# Altium PCB Groundstation.PcbDoc
Units mm, origin at the board's own origin, x right, y up, seen from the top; angles counter-clockwise.
Board outline 53.34 x 50.8 mm, 2 copper layers (Top Layer, Bottom Layer); 8 components, 30 nets, 57 pads, 104 vias.
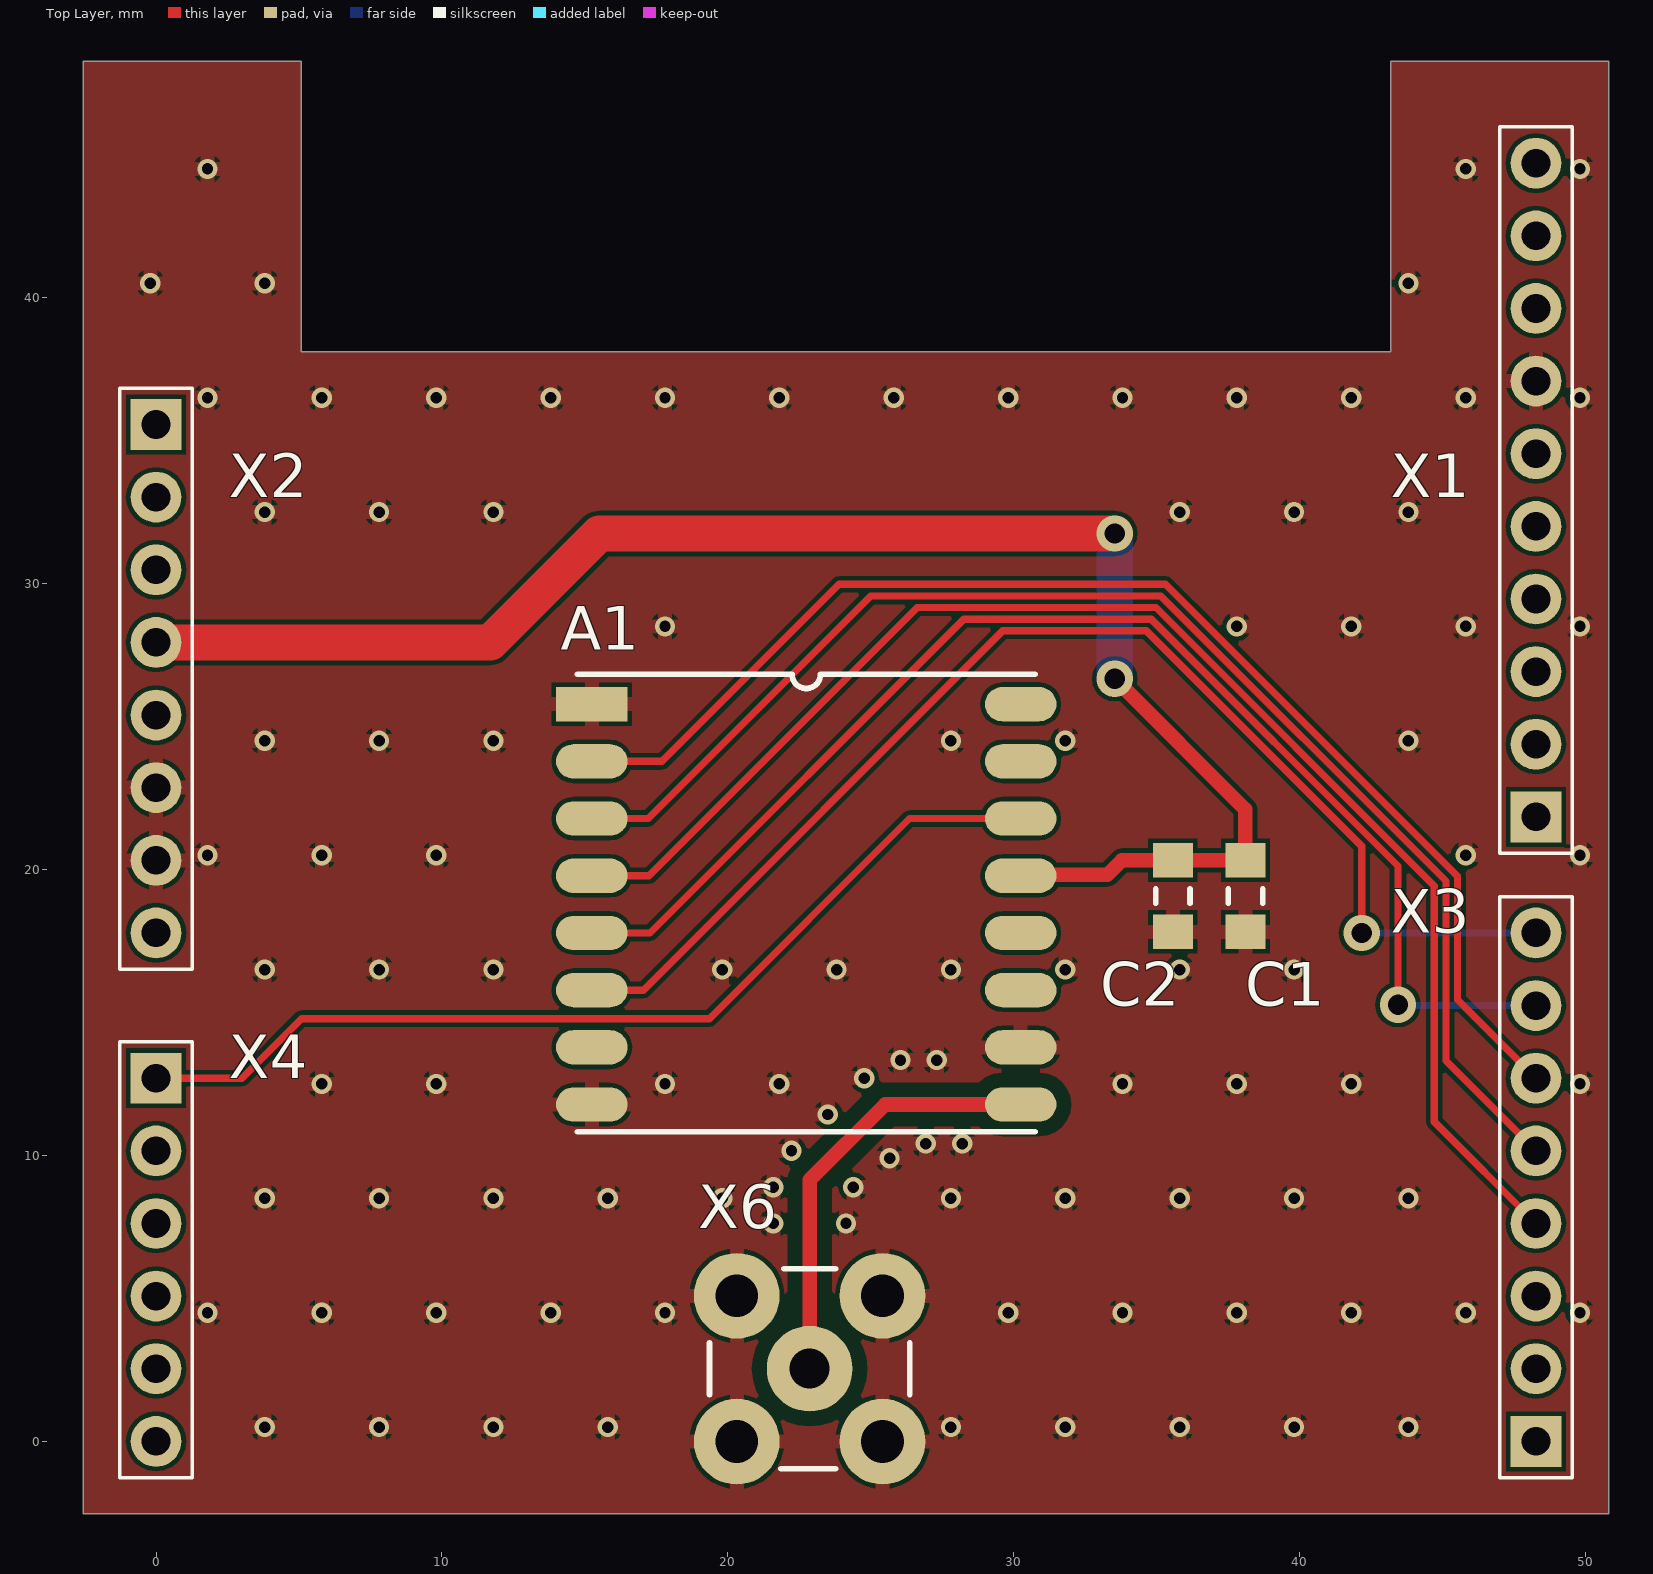
[diagram p0: Top Layer view]
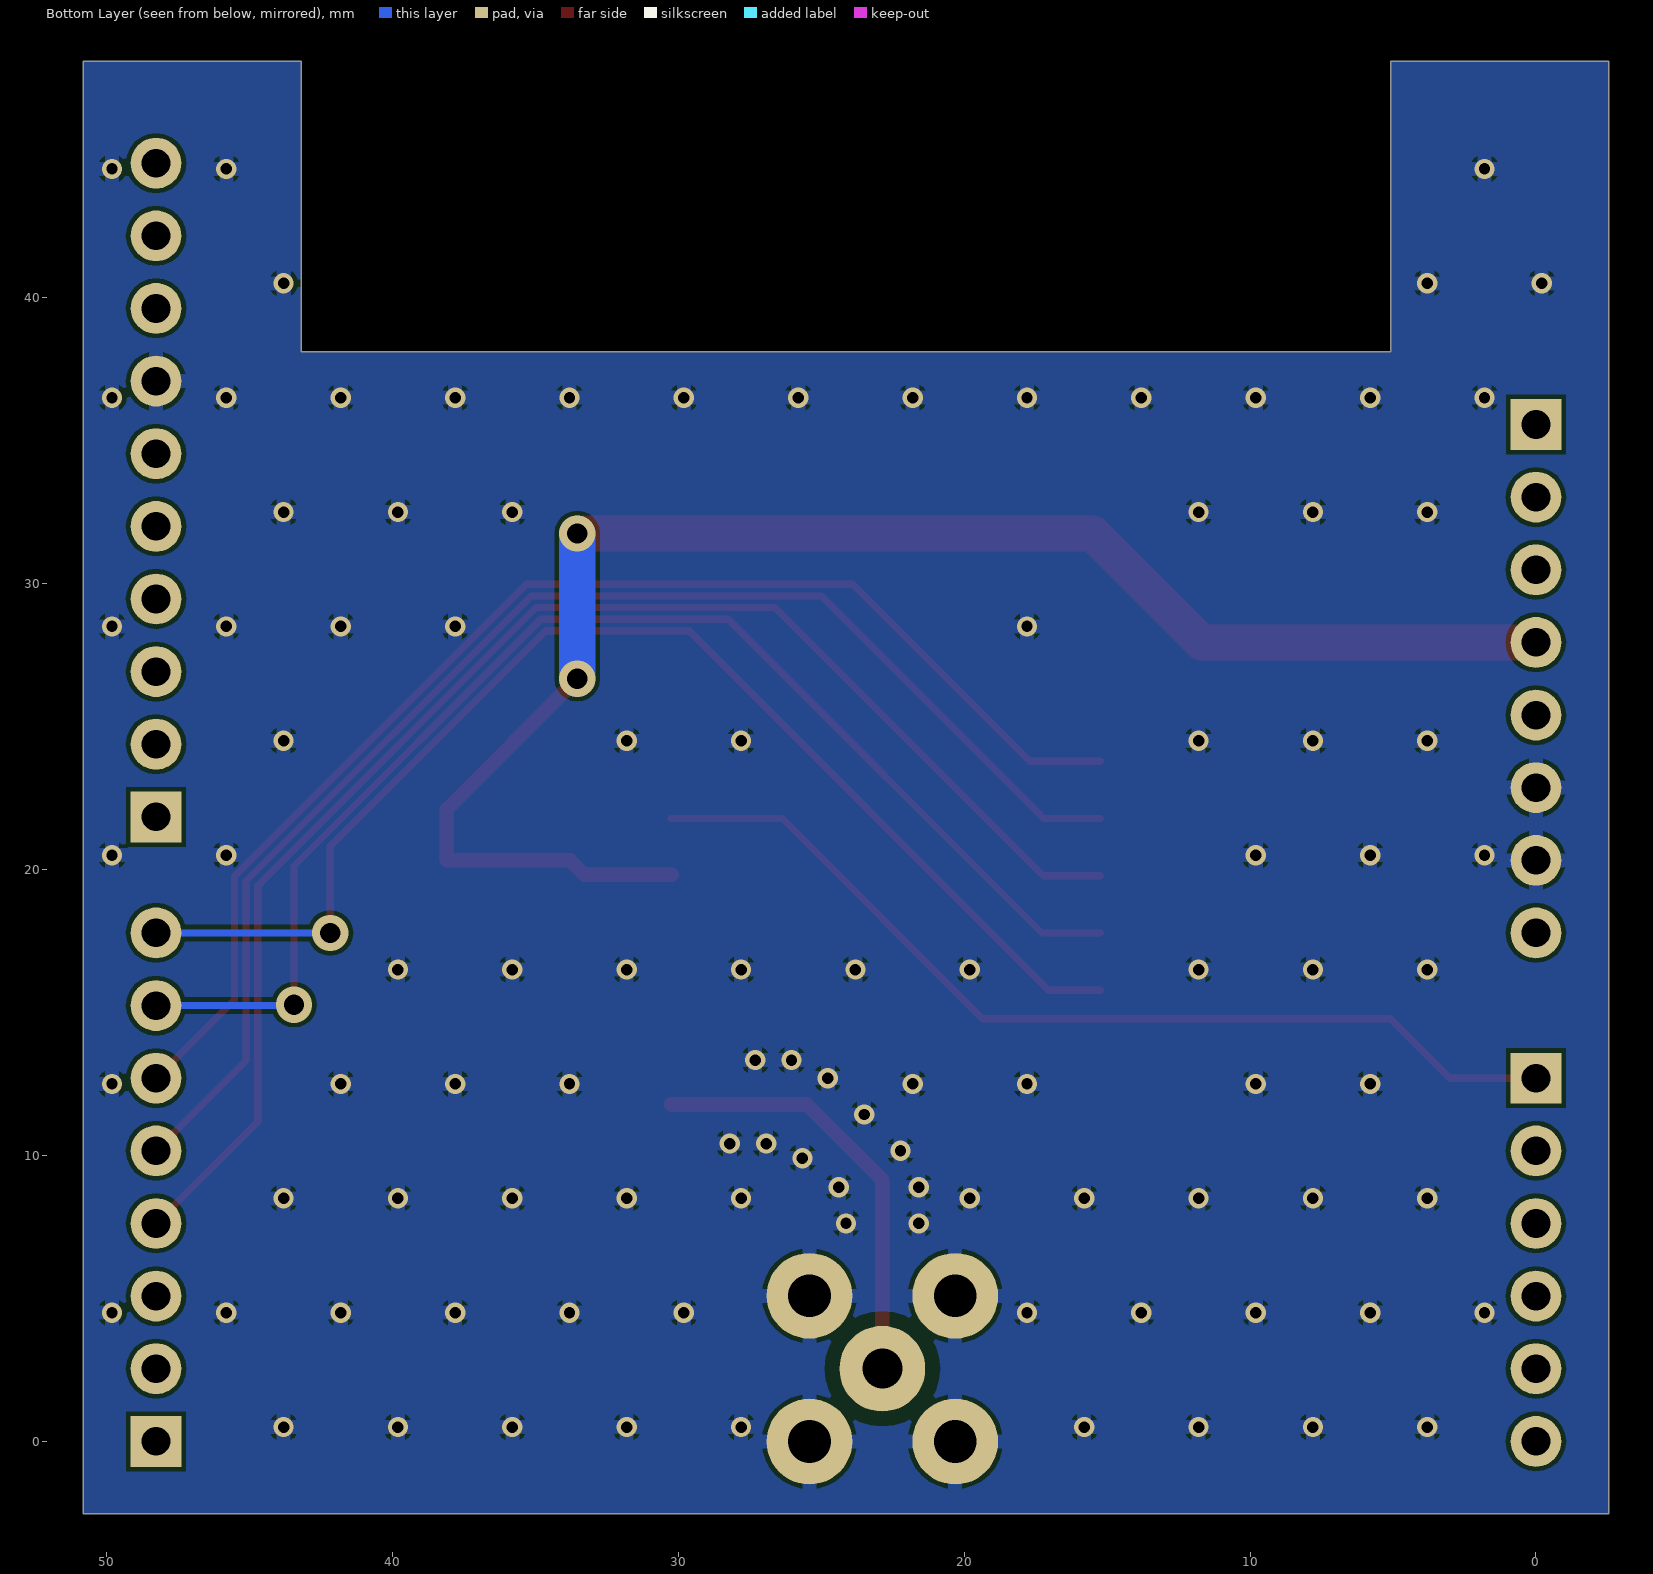
[diagram p1: Bottom Layer view, seen from below]
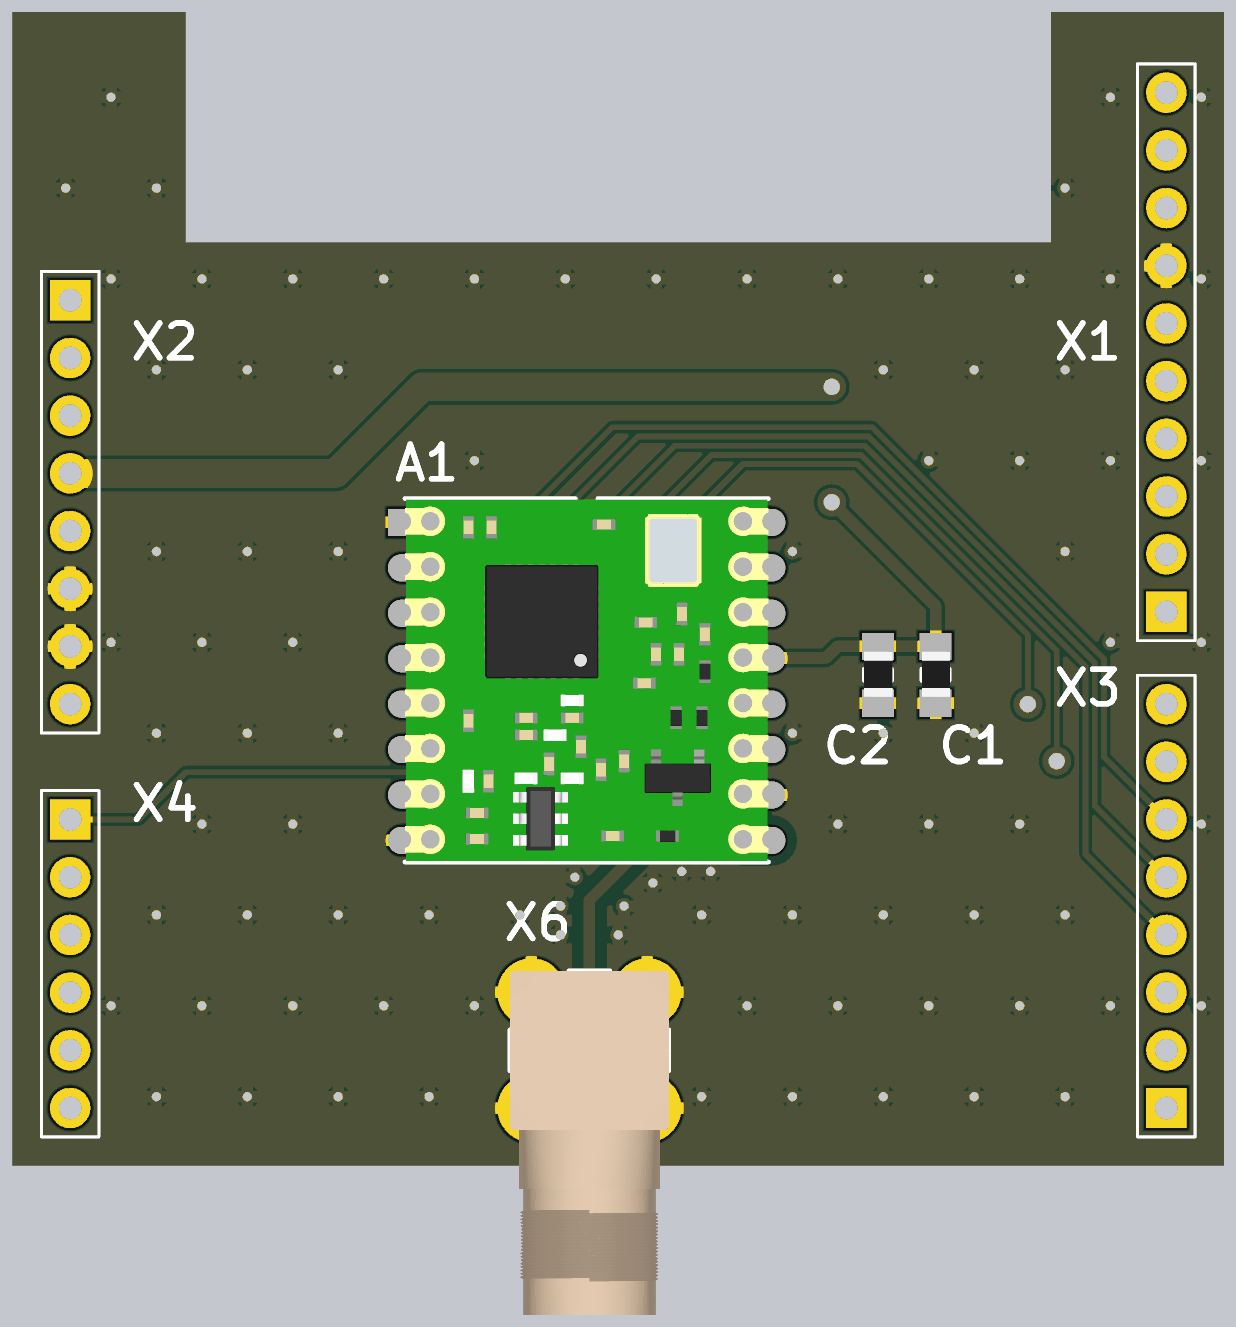
[diagram p2: 3D render of the assembled board from above, using the file's embedded part models]

## Layer stack, top to bottom
Top Solder: solder mask 0.0102, Solder Resist, Dk 3.5
Top Layer: signal copper 0.0356
Dielectric 1: dielectric 0.32, FR-4, Dk 4.8
Bottom Layer: signal copper 0.0356
Bottom Solder: solder mask 0.0102, Solder Resist, Dk 3.5

## Board outline
-2.54,-2.54 -2.54,48.26 5.08,48.26 5.08,38.1 43.18,38.1 43.18,48.26 50.8,48.26 50.8,-2.54

## Design rules (kind name [scope] priority, off if disabled: settings)
Clearance Clearance_HF [InNet('NetA1_9') vs InNet('GND')] p1: gap=0.508 ignorepadtopadclearanceinfootprint=FALSE
Clearance [All] p2: gap=0.152 ignorepadtopadclearanceinfootprint=FALSE except(0: Arc-Hole Track-Hole SMDPad-Hole THPad-Hole Via-Hole Fill-Hole Poly-Hole Region-Hole Text-Hole)
HoleSize [All] p1: absolutevalues=TRUE maxlimit=6.3 minlimit=0.4 maxpercent=80.000 minpercent=20.000
MinimumAnnularRing [All] p1: minimumring=0.152
MinimumSolderMaskSliver [All] p1: minsoldermaskwidth=0.152
PolygonConnect [All] p1: connectstyle=Relief reliefconductorwidth=0.508 reliefentries=4 polygonreliefangle="90 Angle" airgapwidth=0.152
RoomDefinition main [InComponentClass('main')] p1: confinementstyle=ConfineIn formatcopy=TRUE lockcomponents=FALSE outline -2.54,-11.684 50.8,-11.684 50.8,48.26 -2.54,48.26
RoutingVias [All] p1: holewidth=0.711 width=1.27 viastyle="Through Hole" minholewidth=0.4 minwidth=0.711 maxholewidth=6.3 maxwidth=2.54
SilkToSilkClearance [All] p1: silktosilkclearance=0.152
SilkToSolderMaskClearance [IsPad] p1: minsilkscreentomaskgap=0.152 clearancetoexposedcopper=TRUE
SolderMaskExpansion [All] p1: expansion=0.102
Width [All] p1: maxlimit=5 minlimit=0.152 preferedwidth=0.254
26 further rules are at their usual default settings.

## Classes and differential pairs
net class Undefined: NetA1_9

## Components (designator, comment, footprint, x,y, rotation, side; value= is the part's Value field where it differs from the comment)
A1 "RFM98W-433" RFM98W 15.24,25.78 r0 top
C1 "1u" 0805 38.1,17.82 r90 top
C2 "100n" 0805 35.56,17.82 r90 top
X1 "CN5" "Header, 2.54mm pitch, 10pin" 48.26,21.84 r180 top locked
X2 "CN6" "Header, 2.54mm pitch, 8pin" 0,35.56 r0 top locked
X3 "CN10" "Header, 2.54mm pitch, 8pin" 48.26,0 r180 top locked
X4 "CN8" "Header, 2.54mm pitch, 6pin" 0,12.7 r0 top locked
X6 "SMA" SMA 22.86,2.54 r0 top

## Footprints (in the part's own frame and the unit in brackets; to place one, negate y for a bottom-side part, rotate by r counter-clockwise, add the part's x,y. Pads: shape width x height; smd on the part's side, far side on the other; paste and mask are expansions set on the pad)
0805 [mm]
  rect 1.2x1.4 smd: 1(0,0) 2(2.5,0)
  silkscreen extent 1,-0.6 1.5,0.6, body extent 0.27,-0.65 2.27,0.61, height 0.5
"Header, 2.54mm pitch, 6pin" [mil]
  rect 70x70 hole 39.37: 1(0,0)
  round 70 hole 39.37: 2(0,-100) 3(0,-200) 4(0,-300) 5(0,-400) 6(0,-500)
  silkscreen extent -50,-550 50,50
"Header, 2.54mm pitch, 8pin" [mil]
  rect 70x70 hole 39.37: 1(0,0)
  round 70 hole 39.37: 2(0,-100) 3(0,-200) 4(0,-300) 5(0,-400) 6(0,-500) 7(0,-600) 8(0,-700)
  silkscreen extent -50,-750 50,50
"Header, 2.54mm pitch, 10pin" [mil]
  rect 70x70 hole 39.37: 1(0,0)
  round 70 hole 39.37: 2(0,-100) 3(0,-200) 4(0,-300) 5(0,-400) 6(0,-500) 7(0,-600) 8(0,-700) 9(0,-800) 10(0,-900)
  silkscreen extent -50,-950 50,50
RFM98W [mm]
  rect 2.5x1.2 smd: 1(0,0)
  oval 2.5x1.2 smd: 2(0,-2) 3(0,-4) 4(0,-6) 5(0,-8) 6(0,-10) 7(0,-12) 8(0,-14) 9(15,-14) 10(15,-12) 11(15,-10) 12(15,-8) 13(15,-6) 14(15,-4) 15(15,-2) 16(15,0)
  silkscreen extent -0.5,-14.95 15.5,1.05, body extent -0.5,-14.9 15.5,1, height 2.29
SMA [mm]
  round 3 hole 1.4: 1(0,0)
  round 3 hole 1.5: 2(-2.55,-2.55) 2(-2.55,2.55) 2(2.55,-2.55) 2(2.55,2.55)
  silkscreen extent -3.5,-3.5 3.5,3.5, body extent -3.5,-11.65 3.5,3.5, height 10

## Part data
A1: library part RFM98W, "LoRa Module / 433 MHz"
C1 C2: library part Kondensator, Bauform=0805
  C1: Bestell-Nr.=1637035, Bezeichnung=C0805C105K3RACTU, Hersteller=KEMET, Lieferant=Farnell
  C2: Bestell-Nr.=464-6688, Bezeichnung=08055C104KAT2A, Hersteller=AVX, Lieferant="RS Components"
X1: library part "Header 10pin", Bestell-Nr.=3418388, Bezeichnung=5-826629-0, Hersteller="AMP - TE CONNECTIVITY", Lieferant=Farnell
X2 X3: library part "Header 8pin"
X4: library part "Header 6pin"
X6: Bestell-Nr.=1248989, Bezeichnung=5-1814400-1, Hersteller="AMP - TE CONNECTIVITY", Lieferant=Farnell

## Via types
v1: diameter 0.711, hole 0.4, Top Layer to Bottom Layer, tented both sides, 100 vias
v2: diameter 1.27, hole 0.711, Top Layer to Bottom Layer, tented both sides, 4 vias

## Nets (pads, with @x,y where several pads share a name; then routed paths per layer and width w, separated by ;. In a path a pad name is that pad's centre, name@x,y a point inside that pad or via, vN(x,y) a via of type N, cw(c..) or ccw(c..) an arc to the next point about the centre after c; other vN are vias at no path point)
3V3: A1.13 C1.2 C2.2 X2.4 | length 56.5
  Top Layer w0.508: A1.13@30.226,19.812 33.274,19.812 33.782,20.32 C2.2 C1.2 38.1,22.098 v2(33.528,26.67)
  Top Layer w1.27: X2.4 11.691,27.94 15.501,31.75 v2(33.528,31.75)
  Bottom Layer w1.27: v2(33.528,26.67) v2(33.528,31.75)
5V: X2.5
A0: A1.14 X4.1 | length 34
  Top Layer w0.254: X4.1 3.008,12.7 5.091,14.783 19.355,14.783 26.352,21.78 A1.14
A1: X4.2
A2: X4.3
A3: X4.4
A4: X4.5
A5: X4.6
AVDD: X1.8
D0: X3.1
D1: X3.2
D2: X3.3
D3: A1.4 X3.4 | length 50.7
  Top Layer w0.254: A1.4 17.24,19.78 26.619,29.159 34.969,29.159 44.704,19.425 44.704,11.176 X3.4
D4: A1.3 X3.5 | length 48
  Top Layer w0.254: A1.3 17.212,21.78 24.998,29.566 35.138,29.566 45.11,19.593 45.11,13.31 X3.5
D5: A1.2 X3.6 | length 45.3
  Top Layer w0.254: A1.2 17.694,23.78 23.886,29.972 35.306,29.972 45.517,19.761 45.517,15.443 X3.6
D6: A1.5 X3.7 | length 46
  Top Layer w0.254: A1.5 17.272,17.78 28.245,28.753 34.801,28.753 43.434,20.12 v2(43.434,15.272)
  Bottom Layer w0.254: v2(43.434,15.272) 43.466,15.24 X3.7
D7: A1.6 X3.8 | length 44.4
  Top Layer w0.254: A1.6 17.05,15.78 29.616,28.346 34.633,28.346 42.164,20.815 v2(42.164,17.78)
  Bottom Layer w0.254: v2(42.164,17.78) X3.8
D8: X1.1
D9: X1.2
D10: X1.3
D11: X1.4
D12: X1.5
D13: X1.6
D14: X1.9
D15: X1.10
GND: A1.1 A1.8 A1.10 C1.1 C2.1 X1.7 X2.6 X2.7 X6.2
  other v1: 3.8,0.5 7.8,0.5 11.8,0.5 15.8,0.5 27.8,0.5 31.8,0.5 35.8,0.5 39.8,0.5 43.8,0.5 1.8,4.5 5.8,4.5 9.8,4.5 13.8,4.5 17.8,4.5 29.8,4.5 33.8,4.5 37.8,4.5 41.8,4.5 45.8,4.5 49.8,4.5 21.59,7.62 24.13,7.62 3.8,8.5 7.8,8.5 11.8,8.5 15.8,8.5 19.8,8.5 27.8,8.5 31.8,8.5 35.8,8.5 39.8,8.5 43.8,8.5 21.59,8.89 24.384,8.89 25.654,9.906 22.225,10.16 26.924,10.414 28.194,10.414 23.495,11.43 5.8,12.5 9.8,12.5 17.8,12.5 21.8,12.5 33.8,12.5 37.8,12.5 41.8,12.5 49.8,12.5 24.765,12.7 26.035,13.335 27.305,13.335 3.8,16.5 7.8,16.5 11.8,16.5 19.8,16.5 23.8,16.5 27.8,16.5 31.8,16.5 35.8,16.5 39.8,16.5 1.8,20.5 5.8,20.5 9.8,20.5 45.8,20.5 49.8,20.5 3.8,24.5 7.8,24.5 11.8,24.5 27.8,24.5 31.8,24.5 43.8,24.5 17.8,28.5 37.8,28.5 41.8,28.5 45.8,28.5 49.8,28.5 3.8,32.5 7.8,32.5 11.8,32.5 35.8,32.5 39.8,32.5 43.8,32.5 1.8,36.5 5.8,36.5 9.8,36.5 13.8,36.5 17.8,36.5 21.8,36.5 25.8,36.5 29.8,36.5 33.8,36.5 37.8,36.5 41.8,36.5 45.8,36.5 49.8,36.5 -0.2,40.5 3.8,40.5 43.8,40.5 1.8,44.5 45.8,44.5 49.8,44.5
IOREF: X2.2
NetA1_9: A1.9 X6.1 | length 15.1
  Top Layer w0.508: X6.1 22.86,9.144 25.496,11.78 A1.9
NRST: X2.3
VIN: X2.8
pads on no net: A1.7 A1.11 A1.12 A1.15 A1.16 X2.1

## Polygon pours and split planes (outlines as drawn)
GND on Bottom Layer "Ground" (solid, pour order 2): -2.54,-2.54 -2.54,48.26 5.08,48.26 5.08,38.1 43.18,38.1 43.18,48.26 50.8,48.26 50.8,-2.54
GND on Top Layer "Ground" (solid, pour order 0): -2.54,-2.54 -2.54,48.26 5.08,48.26 5.08,38.1 43.18,38.1 43.18,48.26 50.8,48.26 50.8,-2.54

## Silkscreen, mask and mechanical layers (free items; w line width, h text height)
Mechanical 2:
  the board outline again, w0.254